# Altium PCB RF-UNIT-QRP-7W.PcbDoc (part 4 of 4)
Units mm, origin at the board's own origin, x right, y up, seen from the top; angles counter-clockwise.
Board outline 187 x 77 mm, 2 copper layers (Top Layer, Top, Bottom Layer, Bottom); 244 components, 167 nets, 747 pads, 3684 vias.
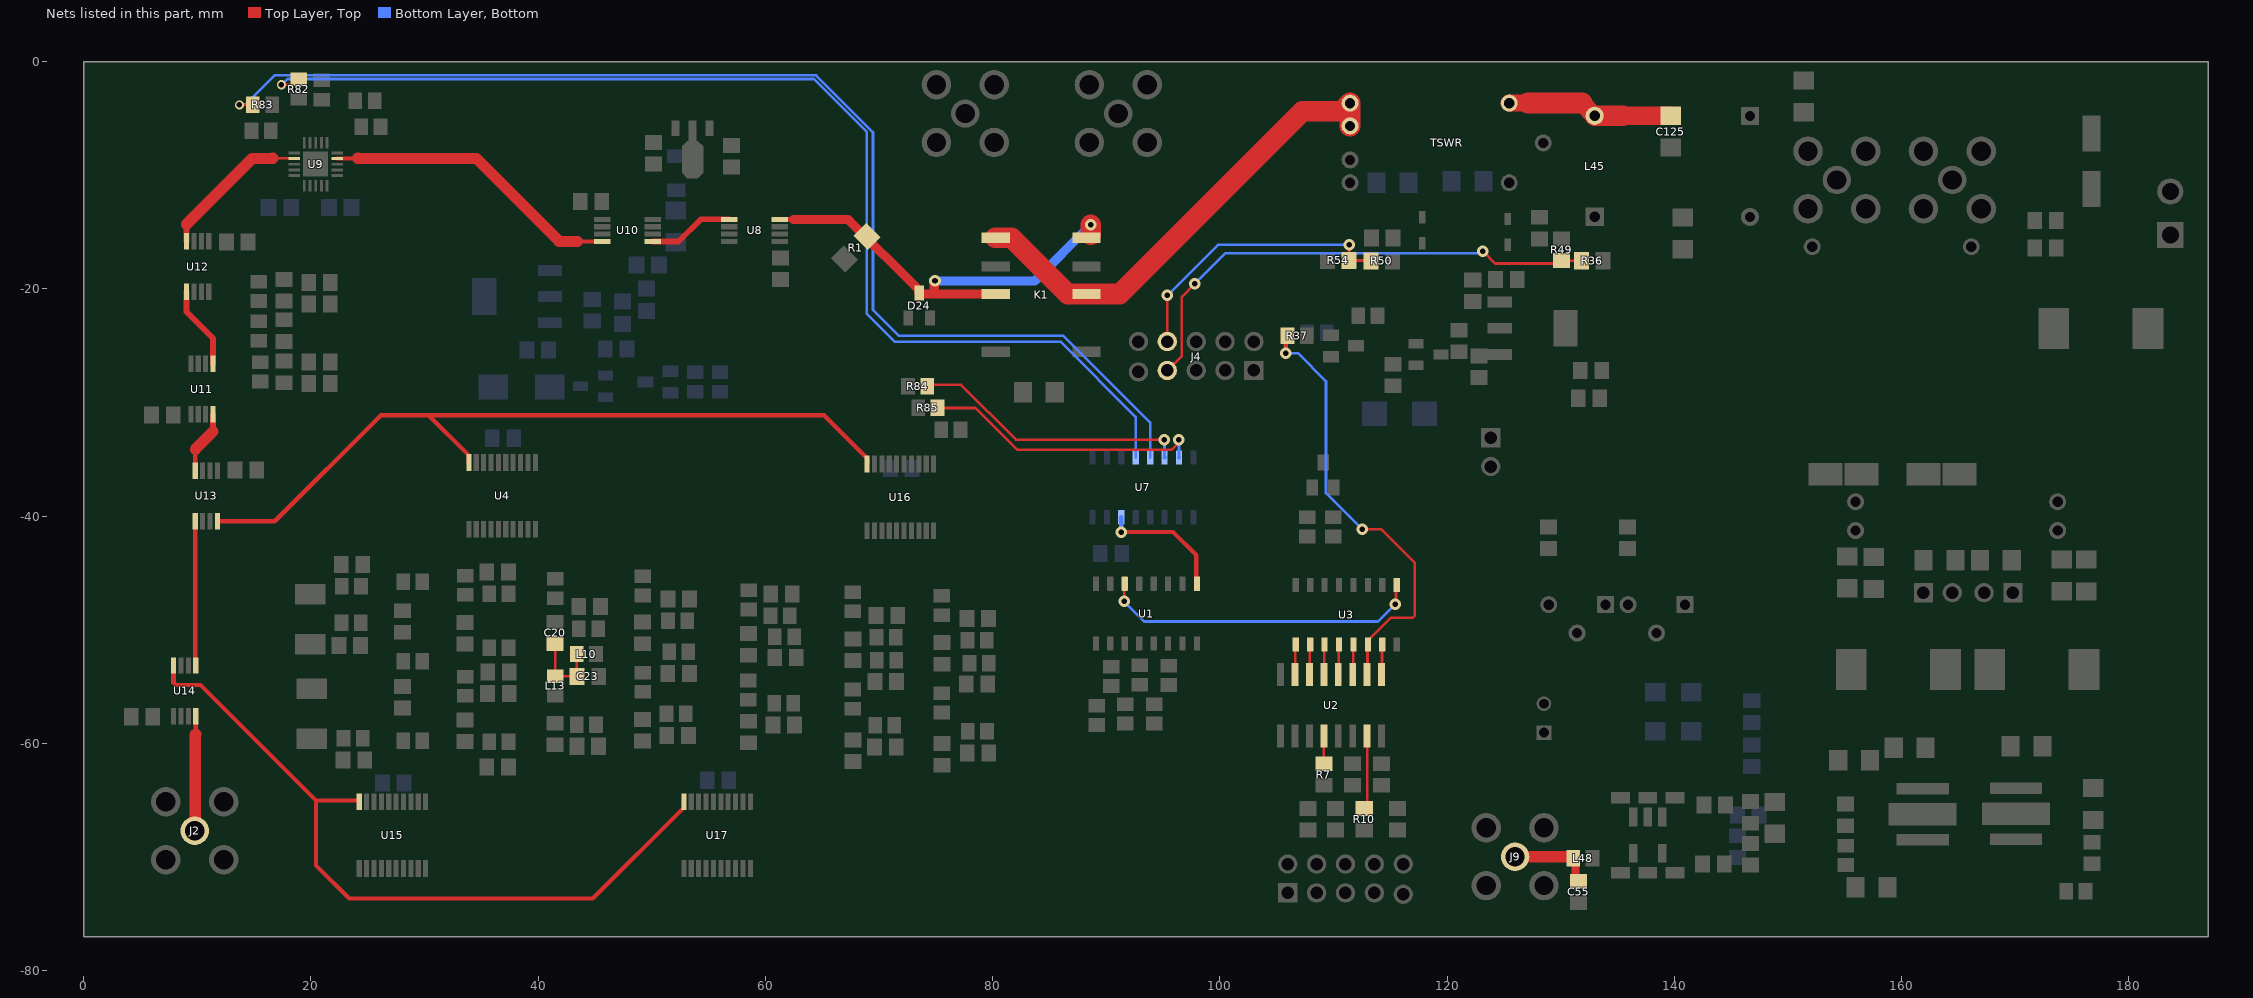
[diagram p4: the nets of this part, all layers, seen from the top]

## Via types
v1: diameter 0.5, hole 0.3, Top Layer, Top to Bottom Layer, Bottom, tented both sides, 1961 vias
v2: diameter 0.6, hole 0.3, Top Layer, Top to Bottom Layer, Bottom, tented both sides, 1584 vias
v3: diameter 1.016, hole 0.486, Top Layer, Top to Bottom Layer, Bottom, tented both sides, 127 vias
v4: diameter 0.8, hole 0.486, Top Layer, Top to Bottom Layer, Bottom, tented both sides, 6 vias
v5: diameter 4, hole 3, Top Layer, Top to Bottom Layer, Bottom, 4 vias
v6: diameter 3.2, hole 3, Top Layer, Top to Bottom Layer, Bottom, 2 vias

## Nets (pads, with @x,y where several pads share a name; then routed paths per layer and width w, separated by ;. In a path a pad name is that pad's centre, name@x,y a point inside that pad or via, vN(x,y) a via of type N, cw(c..) or ccw(c..) an arc to the next point about the centre after c; other vN are vias at no path point) (continued)
NetR82_2: R82.2 U7.4 | length 102.4
  Top Layer, Top w0.23: v4(17.399,-2.032) 18.376,-2.032 18.884,-1.524 R82.2@18.923,-1.563
  Bottom Layer, Bottom w0.23: v4(17.399,-2.032) 17.442,-2.032 17.947,-1.527 64.265,-1.527 68.926,-6.188 68.926,-22.19 71.374,-24.638 85.979,-24.638 92.597,-31.256 U7.4@92.597,-34.84
NetR83_2: R83.2 U7.5 | length 107.3
  Top Layer, Top w0.23: v4(13.716,-3.81) R83.2@14.898,-3.81
  Bottom Layer, Bottom w0.23: v4(13.716,-3.81) 14.205,-3.81 16.807,-1.208 64.454,-1.208 69.469,-6.223 69.469,-21.844 71.752,-24.127 86.23,-24.127 93.867,-31.764 U7.5@93.867,-34.84
NetR84_2: R84.2 U7.6 | length 24.5
  Top Layer, Top w0.23: R84.2@74.256,-28.575 74.383,-28.448 77.216,-28.448 82.042,-33.274 v3(95.123,-33.274)
  Bottom Layer, Bottom w0.23: U7.6@95.13,-34.833 v3@95.13,-33.281
  Bottom Layer, Bottom w0.381: v3(95.123,-33.274) v3@95.13,-33.281 ; U7.6@95.13,-34.833 U7.6@95.137,-34.84
NetR85_2: R85.2 U7.7 | length 24.9
  Top Layer, Top w0.23: R85.2@75.145,-30.48 78.486,-30.48 82.169,-34.163 95.758,-34.163 96.393,-33.528 v3(96.393,-33.274)
  Bottom Layer, Bottom w0.23: U7.7@96.4,-34.833 v3@96.4,-33.281
  Bottom Layer, Bottom w0.381: v3(96.393,-33.274) v3@96.4,-33.281 ; U7.7@96.4,-34.833 U7.7@96.407,-34.84
NetU1_9: U1.9 U7.14 | length 11.3
  Top Layer, Top w0.381: v3(91.313,-41.402) 95.885,-41.402 97.917,-43.434 97.917,-45.882 U1.9@97.984,-45.949
  Bottom Layer, Bottom w0.381: v3(91.313,-41.402) 91.32,-41.395 91.32,-40.097 U7.14@91.327,-40.09
NetU1_14: U1.14 U3.9 | length 28.6
  Top Layer, Top w0.23: v3@91.6,-47.465 U1.14@91.6,-45.982 ; v3(115.443,-47.752) 115.506,-47.689 115.506,-46.122 U3.9@115.57,-46.058
  Top Layer, Top w0.381: v3(91.567,-47.498) v3@91.6,-47.465 ; U1.14@91.6,-45.982 U1.14@91.634,-45.949
  Bottom Layer, Bottom w0.23: v3(91.567,-47.498) 93.345,-49.276 113.919,-49.276 v3(115.443,-47.752)
NetU2_1: U2.1 U3.7 | length 2.7
  Top Layer, Top w0.23: U2.1@114.233,-53.948 114.266,-53.914 114.266,-51.342 U3.7@114.3,-51.308
NetU2_3: U2.3 U3.5 | length 2.7
  Top Layer, Top w0.23: U2.3@111.693,-53.948 111.726,-53.914 111.726,-51.342 U3.5@111.76,-51.308
NetU2_4: U2.4 U3.4 | length 2.7
  Top Layer, Top w0.23: U2.4@110.423,-53.948 110.456,-53.914 110.456,-51.342 U3.4@110.49,-51.308
NetU2_5: U2.5 U3.3 | length 2.7
  Top Layer, Top w0.23: U2.5@109.153,-53.948 109.186,-53.914 109.186,-51.342 U3.3@109.22,-51.308
NetU2_6: U2.6 U3.2 | length 2.7
  Top Layer, Top w0.23: U2.6@107.883,-53.948 107.916,-53.914 107.916,-51.342 U3.2@107.95,-51.308
NetU2_7: U2.7 U3.1 | length 2.7
  Top Layer, Top w0.23: U2.7@106.613,-53.948 106.646,-53.914 106.646,-51.342 U3.1@106.68,-51.308
NetU4_10: U4.10 U13.8 U16.10 | length 68.8
  Top Layer, Top w0.381: U13.8@11.77,-40.452 16.825,-40.452 26.162,-31.115 30.353,-31.115 ; U4.10@33.905,-35.289 33.905,-34.667 30.353,-31.115 ; U16.10@68.957,-35.416 68.957,-34.903 65.169,-31.115 30.353,-31.115
NetU8_5: U8.5 U10.5 | length 7.5
  Top Layer, Top w0.5: U10.5@50.104,-15.834 52.365,-15.834 54.315,-13.884 U8.5@56.83,-13.884
NetU11_5: U11.5 U12.5 | length 7.3
  Top Layer, Top w0.5: U12.5@9.058,-20.259 9.058,-22.012 11.389,-24.343 U11.5@11.389,-26.604
NetU13_5: U13.5 U14.5 | length 12.7
  Top Layer, Top w0.381: U14.5@9.82,-53.147 U13.5@9.82,-40.452
NetU14_8: U14.8 U15.10 U17.10 | length 65.4
  Top Layer, Top w0.381: 7.915,-54.651 8.128,-54.864 10.287,-54.864 20.447,-65.024 ; U15.10@24.253,-65.134 24.253,-65.059 24.218,-65.024 20.447,-65.024 ; U17.10@52.828,-65.134 52.828,-65.647 44.815,-73.66 23.368,-73.66 20.447,-70.739 20.447,-65.024
  Top Layer, Top w0.45: 7.915,-54.651 U14.8@7.915,-53.147
PTT_OUT: R10.2 U2.15 | length 6.5
  Top Layer, Top w0.23: R10.2@112.709,-65.731 112.963,-65.477 U2.15@112.963,-59.348
RF_TX_IN: C55.2 J9.5 L48.1 | length 7.4
  Top Layer, Top w0.381: L48.1@130.976,-69.977 L48.1@131.103,-70.104 L48.1@131.318,-70.319 ; C55.2@131.318,-71.875 C55.2@131.572,-72.129
  Top Layer, Top w0.7: C55.2@131.318,-71.875 L48.1@131.318,-70.319
  Top Layer, Top w1: J9.5@125.984,-69.977 L48.1@130.976,-69.977
RX_ATT_LPF: U9.2 U12.4 | length 13.4
  Top Layer, Top w0.23: 16.637,-8.509 U9.2@18.522,-8.529
  Top Layer, Top w0.5: U12.4@9.058,-15.809 9.058,-14.31
  Top Layer, Top w1: 9.058,-14.31 9.906,-13.462 14.839,-8.529 16.637,-8.509
RX_BPF_OUT: J2.5 U14.4 | length 10.2
  Top Layer, Top w0.381: J2.5@9.758,-67.67 J2.5@9.779,-67.691 J2.5@9.83,-67.64 ; 9.865,-59.182 U14.4@9.865,-57.597
  Top Layer, Top w1: J2.5@9.83,-67.64 9.83,-59.217 9.865,-59.182
RX_IN_LNA: D24.3 K1.4 K1.7 R1.2 U8.4 | length 39.7
  Top Layer, Top w0.381: U8.4@61.28,-13.884 62.484,-13.884 ; 67.279,-13.884 67.401,-14.006 ; 74.803,-20.444 74.864,-20.383 ; v3@74.864,-19.37 v3(74.93,-19.304)
  Top Layer, Top w0.8: 62.484,-13.884 67.279,-13.884 ; 67.401,-14.006 73.533,-20.138 D24.3@73.533,-20.363 73.614,-20.444 74.803,-20.444 K1.7@80.265,-20.444 ; 74.864,-20.383 v3@74.864,-19.37
  Top Layer, Top w1.83: K1.4@88.646,-15.234 v3(88.646,-14.351)
  Bottom Layer, Bottom w0.8: v3(74.93,-19.304) 83.693,-19.304 v3(88.646,-14.351)
RX_LNA_ATT: U9.14 U10.4 | length 26.4
  Top Layer, Top w0.381: U9.14@22.322,-8.529 24.13,-8.509 ; 43.434,-15.834 U10.4@45.654,-15.834
  Top Layer, Top w1: 24.13,-8.509 34.564,-8.529 41.869,-15.834 43.434,-15.834
RX_LPF_BPF: U11.4 U13.4 | length 5.6
  Top Layer, Top w0.381: U13.4@9.82,-36.002 9.82,-34.122 9.842,-34.1
  Top Layer, Top w0.5: 11.389,-32.553 U11.4@11.389,-31.054
  Top Layer, Top w1: 9.842,-34.1 11.389,-32.553
SWR_DET_BACKW: J4.8 R50.2 R54.2 | length 25.2
  Top Layer, Top w0.089: R54.2@111.377,-17.501 R54.2@111.379,-17.498
  Top Layer, Top w0.23: J4.8@95.377,-24.638 v3(95.377,-20.574) ; R54.2@111.377,-17.501 113.255,-17.501 R50.2@113.296,-17.542 ; R54.2@111.379,-17.498 v3(111.379,-16.129)
  Bottom Layer, Bottom w0.23: v3(95.377,-20.574) 99.822,-16.129 v3(111.379,-16.129)
SWR_DET_FORW: J4.7 R36.1 R49.2 | length 44.6
  Top Layer, Top w0.23: J4.7@95.377,-27.178 96.647,-25.908 96.647,-20.701 v3(97.79,-19.558) ; v3(123.14,-16.677) 124.225,-17.763 130.078,-17.763 R49.2@130.078,-17.511 130.09,-17.523 R36.1@131.823,-17.523
  Bottom Layer, Bottom w0.23: v3(97.79,-19.558) 100.469,-16.879 122.725,-16.879 122.927,-16.677 v3(123.14,-16.677)
SWR_OUT: K1.2 K1.5 TSWR.2 TSWR.5 | length 44.2
  Top Layer, Top w1.83: K1.5@80.265,-15.494 81.661,-15.494 86.611,-20.444 K1.2@88.265,-20.444 88.268,-20.447 91.186,-20.447 107.27,-4.363 110.756,-4.363 TSWR.2@111.466,-3.653 TSWR.5@111.466,-5.653
  Bottom Layer, Bottom w1.5: TSWR.5@111.466,-5.653 TSWR.2@111.466,-3.653
TUNE_OUT: R7.2 U2.12 | length 2.4
  Top Layer, Top w0.23: R7.2@109.153,-61.794 U2.12@109.153,-59.348
TX_LPF_OUT: C125.2 L45.2 TSWR.1 | length 14.7
  Top Layer, Top w1.5: TSWR.1@125.466,-3.653 127.131,-3.653
  Top Layer, Top w1.6: 131.872,-3.653 L45.2@132.988,-4.769 ; 135.43,-4.757 C125.2@139.689,-4.757
  Top Layer, Top w1.83: 127.131,-3.653 131.872,-3.653 ; L45.2@132.988,-4.769 135.419,-4.769 135.43,-4.757
TXAMP: R37.2 U2.2 U3.6 | length 39
  Top Layer, Top w0.23: v3(112.522,-41.148) 114.173,-41.148 117.158,-44.133 117.158,-48.735 116.934,-48.958 115.03,-48.958 113.03,-50.958 U3.6@113.03,-51.308 112.996,-51.342 112.996,-53.914 U2.2@112.963,-53.948
  Top Layer, Top w0.381: v3(105.791,-25.654) 105.791,-24.296 R37.2@105.957,-24.13
  Bottom Layer, Bottom w0.23: v3(105.791,-25.654) 106.87,-25.654 109.347,-28.131 109.347,-37.973 v3(112.522,-41.148)
"Сеть 105": C20.1 C23.2 L10.2 L13.1 | length 6.7
  Top Layer, Top w0.23: C20.1@41.504,-51.235 L13.1@41.504,-54.092 43.357,-54.092 43.409,-54.041 43.409,-52.156 L10.2@43.389,-52.136
pads on no net: T5.2 T5.5 T5.8 U1.7 U7.9

## Polygon pours and split planes (outlines as drawn)
GND on Top Layer, Top "Bottom Layer, Bottom-GND" (solid, remove dead copper, pour order 10): 0,0 186.939,0 186.939,-77.061 0,-77
NetC128_1 on Top Layer, Top "Top Layer, Top-Сеть 31" (solid, pour order 0): 127,-21 127,-26 134,-26 134,-21
GND on Bottom Layer, Bottom "Bottom Layer, Bottom-GND" (solid, remove dead copper, pour order 6): 0,-0.206 186.939,-0.206 186.939,-77 0,-77
NetC121_2 on Bottom Layer, Bottom "Bottom Layer, Bottom-Сеть 141" (solid, pour order 4): 29,-16 29,-24 39,-24 39,-16

## Keep-outs
Keep-Out Layer, Board:
  lines w0.127: 0,-77.088 0,0 187,0 187,-77
  lines w0.14: 0,-77.088 186.999,-77.088 ; 0,-77 0,0 187,0 187,-77

## Silkscreen, mask and mechanical layers (free items; w line width, h text height)
Top Overlay, Top Silk:
  region: 110.207,-7.193 110.202,-7.248 110.188,-7.302 110.164,-7.352 110.132,-7.397 110.093,-7.436 110.048,-7.468 109.998,-7.491 109.944,-7.506 109.889,-7.511 109.834,-7.506 109.781,-7.491 109.73,-7.468 109.685,-7.436 109.646,-7.397 109.614,-7.352 109.591,-7.302 109.577,-7.248 109.572,-7.193 109.577,-7.138 109.591,-7.085 109.614,-7.034 109.646,-6.989 109.685,-6.95 109.73,-6.918 109.781,-6.895 109.834,-6.88 109.889,-6.876 109.944,-6.88 109.998,-6.895 110.048,-6.918 110.093,-6.95 110.132,-6.989 110.164,-7.034 110.188,-7.085 110.202,-7.138 110.207,-7.193
  text "LNA" at 42.121,-7.084 h2.08
  text "ATT" at 22.225,-14.224 h2.08
  text "LPF" at 5.309,-26.521 h2.08 r90
  text "BPF" at 5.08,-50.8 h2.08 r90
  text "UA3REO" at 145.161,-52.959 h2.08 r90
  text "RF-UNIT rev20" at 147.447,-53.34 h1.25 r90
  text "HPF" at 27.432,-62.738 h1.67
  text "DAC" at 120.904,-64.516 h2.08
  text "2m" at 20.574,-65.151 h2 r90
  text "40" at 61.976,-66.04 h2.08 r90
  text "30" at 51.435,-67.183 h2.08 r90
  text "80" at 69.723,-68.707 h2.08 r90
  text "160" at 78.613,-70.485 h2.08 r90
  text "20,17" at 45.085,-71.12 h1.67 r90
  text "ADC" at 7.112,-74.803 h2.08
  text "15,12,10,6" at 36.957,-75.946 h1.67 r90
Bottom Overlay, Bot Silk:
  rectangle: 96.393,-29.21 99.695,-28.448

## Text inside footprints (layer, text, board x,y; h text height)
FAN_OUT: Mechanical 1, Top Assy "BOARD EDGE" at 125.479,-32.183 h0.42 r270